# Altium PCB MyBus_microATXholes.PcbDoc
Units mm, origin at the board's own origin, x right, y up, seen from the top; angles counter-clockwise.
Board outline 241.3 x 222.25 mm, 2 copper layers (Top Layer, Bottom Layer); 10 components, 19 nets, 202 pads, 0 vias.
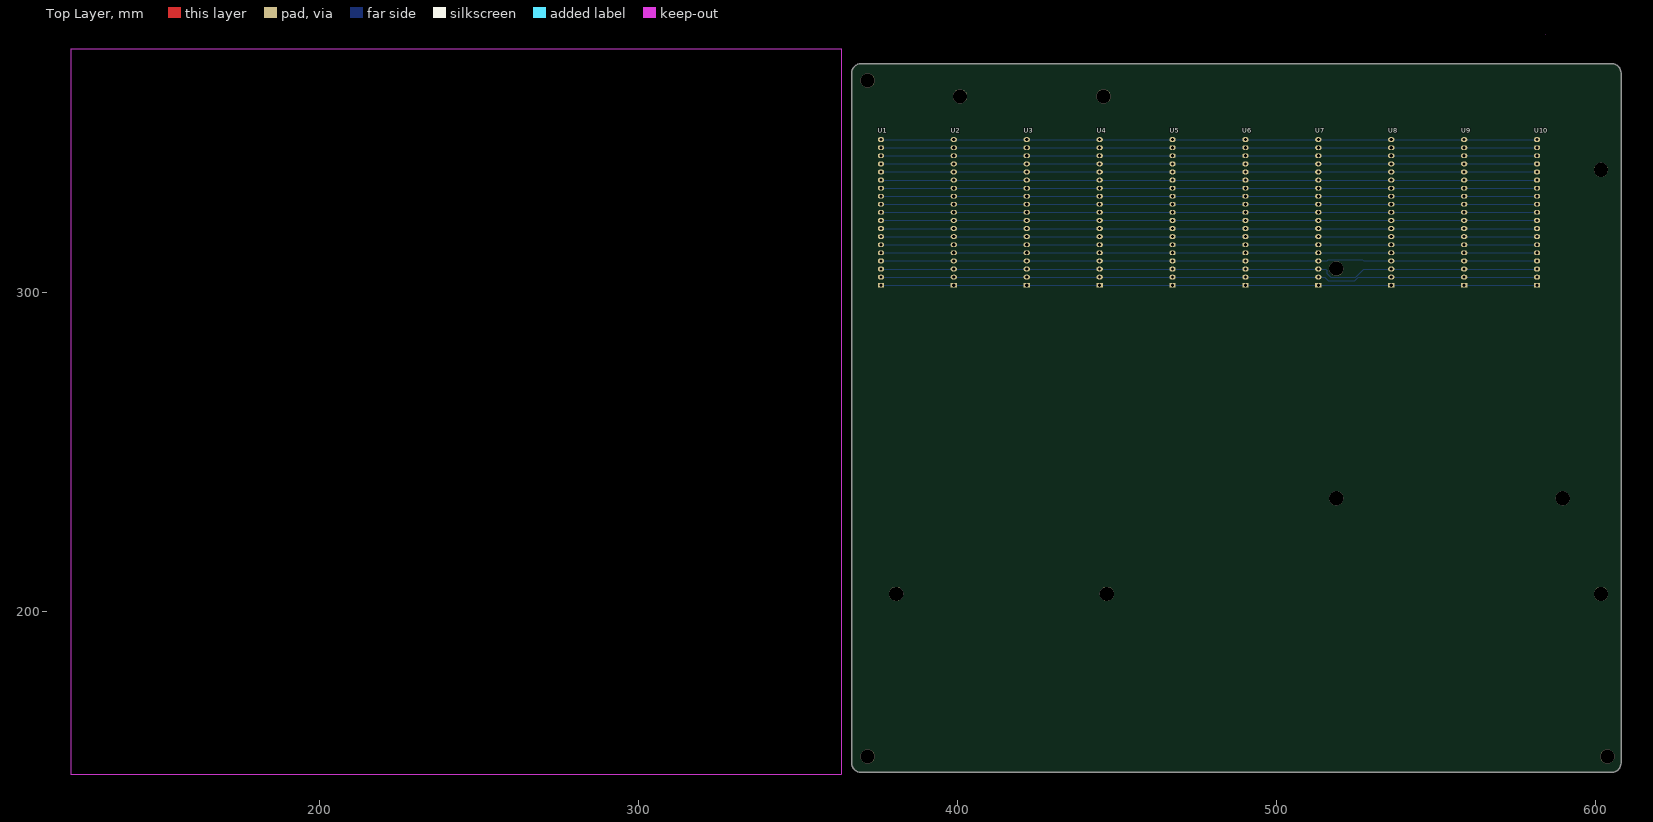
[diagram p0: Top Layer view]
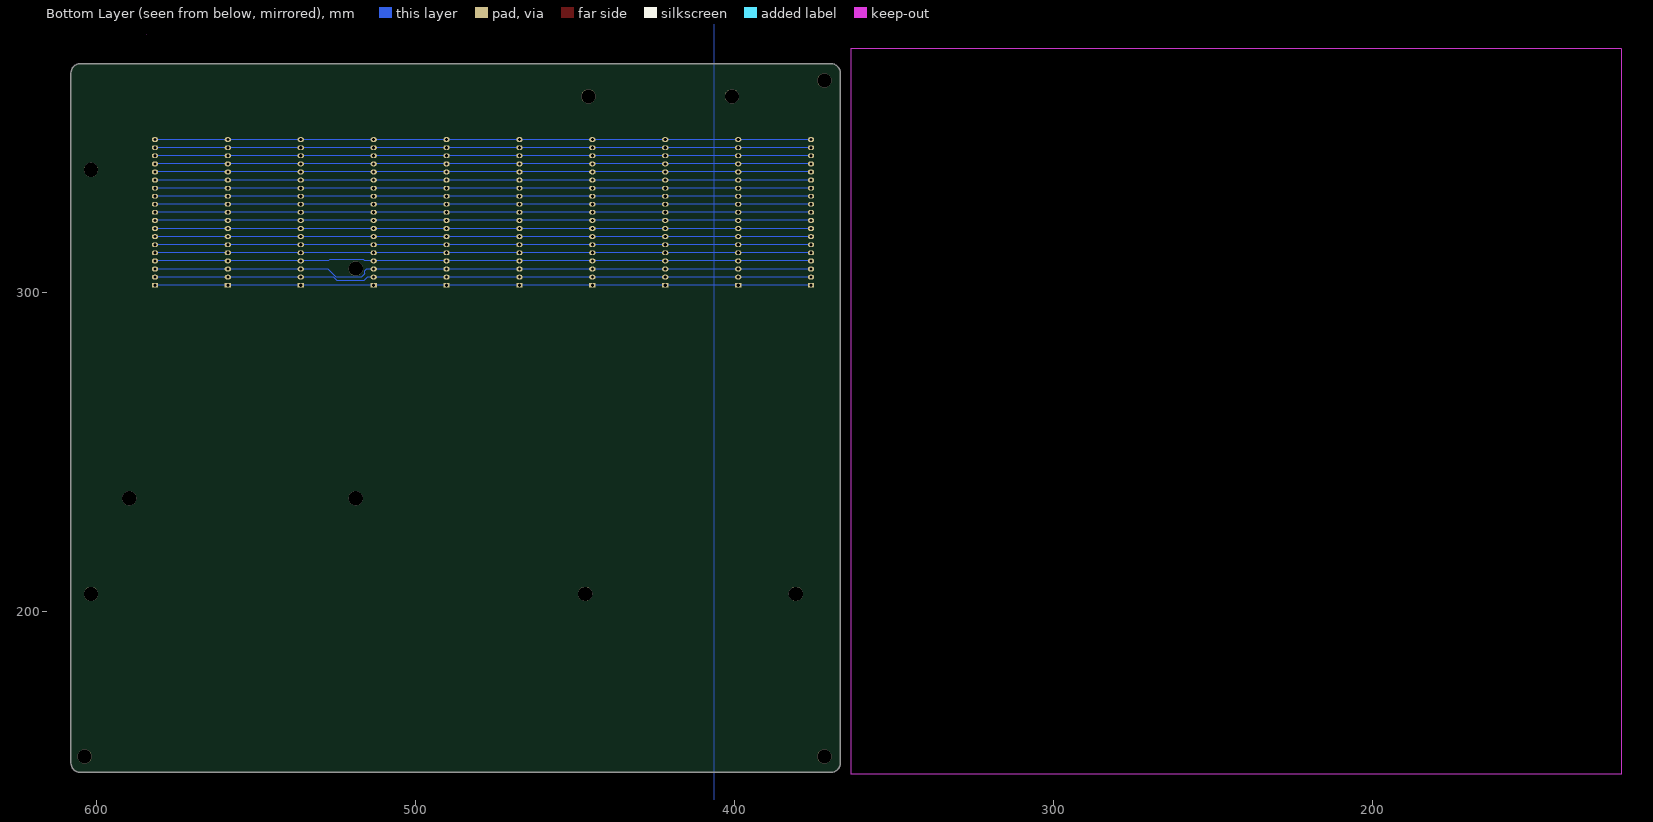
[diagram p1: Bottom Layer view, seen from below]
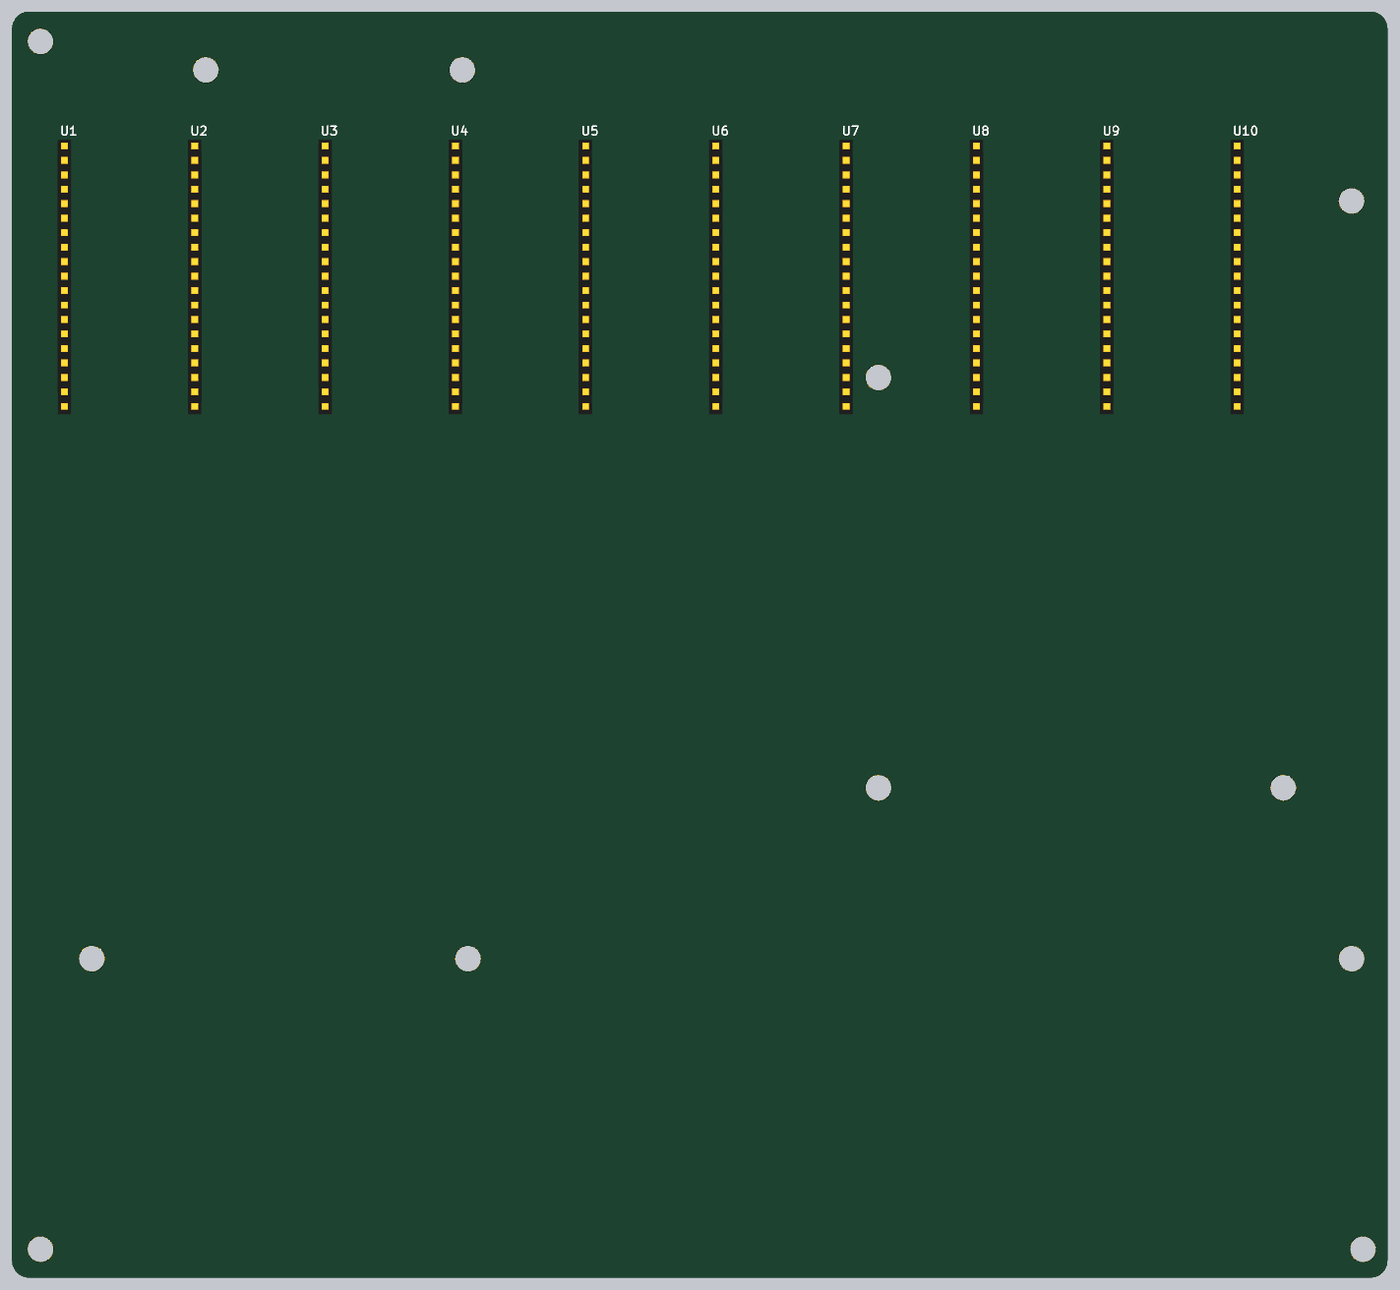
[diagram p2: 3D render of the assembled board from above, using the file's embedded part models]

## Layer stack, top to bottom
Top Solder: solder mask 0.0102, Solder Resist, Dk 3.5
Top Layer: signal copper 0.0356
Dielectric 1: dielectric 0.32, FR-4, Dk 4.8
Bottom Layer: signal copper 0.0356
Bottom Solder: solder mask 0.0102, Solder Resist, Dk 3.5

## Board outline
605.025,371.72 369.725,371.72 369.14,371.662 368.577,371.492 368.058,371.214 367.604,370.841 367.231,370.387 366.953,369.868 366.783,369.305 366.725,368.72 366.725,152.47 366.783,151.885 366.953,151.322 367.231,150.803 367.604,150.349 368.058,149.976 368.577,149.698 369.14,149.528 369.725,149.47 605.025,149.47 605.61,149.528 606.173,149.698 606.692,149.976 607.146,150.349 607.519,150.803 607.797,151.322 607.967,151.885 608.025,152.47 608.025,368.72 607.967,369.305 607.797,369.868 607.519,370.387 607.146,370.841 606.692,371.214 606.173,371.492 605.61,371.662
cut-out: 584.2,381

## Design rules (kind name [scope] priority, off if disabled: settings)
Clearance [All] p1: gap=0.254 ignorepadtopadclearanceinfootprint=FALSE except(0: Arc-Hole Track-Hole SMDPad-Hole THPad-Hole Via-Hole Fill-Hole Poly-Hole Region-Hole Text-Hole)
PolygonConnect [All] p1: connectstyle=Relief reliefconductorwidth=0.254 reliefentries=4 polygonreliefangle="90 Angle" airgapwidth=0.254
RoutingVias [All] p1: holewidth=0.711 width=1.27 viastyle="Through Hole" minholewidth=0.711 minwidth=1.27 maxholewidth=0.711 maxwidth=1.27
SolderMaskExpansion [All] p1: expansion=0.102
Width [All] p1: maxlimit=0.254 minlimit=0.254 preferedwidth=0.254
30 further rules are at their usual default settings.

## Components (designator, comment, footprint, x,y, rotation, side; value= is the part's Value field where it differs from the comment)
U1 "ETF 9 pin female socket" 1x19FEMALEHEADER 377.116,301.013 r90 top
U2 "ETF 9 pin female socket" 1x19FEMALEHEADER 399.976,301.013 r90 top
U3 "ETF 9 pin female socket" 1x19FEMALEHEADER 422.836,301.013 r90 top
U4 "ETF 9 pin female socket" 1x19FEMALEHEADER 445.696,301.013 r90 top
U5 "ETF 9 pin female socket" 1x19FEMALEHEADER 468.556,301.013 r90 top
U6 "ETF 9 pin female socket" 1x19FEMALEHEADER 491.416,301.013 r90 top
U7 "ETF 9 pin female socket" 1x19FEMALEHEADER 514.276,301.013 r90 top
U8 "ETF 9 pin female socket" 1x19FEMALEHEADER 537.136,301.013 r90 top
U9 "ETF 9 pin female socket" 1x19FEMALEHEADER 559.996,301.013 r90 top
U10 "ETF 9 pin female socket" 1x19FEMALEHEADER 582.856,301.013 r90 top

## Footprints (in the part's own frame and the unit in brackets; to place one, negate y for a bottom-side part, rotate by r counter-clockwise, add the part's x,y. Pads: shape width x height; smd on the part's side, far side on the other; paste and mask are expansions set on the pad)
1x19FEMALEHEADER [mm]
  rect 1.5x2 hole 1: 1(1.247,1.196)
  oval 1.5x2 hole 1: 2(3.787,1.196) 3(6.327,1.196) 4(8.867,1.196) 5(11.407,1.196) 6(13.947,1.196) 7(16.487,1.196) 8(19.027,1.196) 9(21.567,1.196) 10(24.107,1.196) 11(26.647,1.196) 12(29.137,1.196) 13(31.677,1.196) 14(34.217,1.196) 15(36.757,1.196) 16(39.297,1.196) 17(41.837,1.196) 18(44.377,1.196) 19(46.917,1.196)
  body extent 0,0 48.26,2.41, height 8.51

## Part data
U1 U2 U3 U4 U5 U6 U7 U8 U9 U10: library part 1x9socket

## Free pads (board coordinates)
  round 4.472 hole 4.472: 1(371.725,154.47) 1(371.725,366.47) 1(380.725,205.47) 1(400.725,361.47) 1(445.725,361.47) 1(446.725,205.47) 1(518.725,235.47) 1(518.725,307.47) 1(589.725,235.47) 1(601.725,205.47) 1(601.725,338.47) 1(603.725,154.47)

## Nets (pads, with @x,y where several pads share a name; then routed paths per layer and width w, separated by ;. In a path a pad name is that pad's centre, name@x,y a point inside that pad or via, vN(x,y) a via of type N, cw(c..) or ccw(c..) an arc to the next point about the centre after c; other vN are vias at no path point)
Bus1Pin1: U1.1 U2.1 U3.1 U4.1 U5.1 U6.1 U7.1 U8.1 U9.1 U10.1 | length 205.7
  Bottom Layer w0.254: U1.1 U2.1 U3.1 U4.1 U5.1 U6.1 U7.1 U8.1 U9.1 U10.1
Bus1Pin2: U1.2 U2.2 U3.2 U4.2 U5.2 U6.2 U7.2 U8.2 U9.2 U10.2 | length 206.6
  Bottom Layer w0.254: U1.2 U2.2 U3.2 U4.2 U5.2 U6.2 U7.2 515.112,304.8 516.179,303.733 524.485,303.733 525.551,304.8 U8.2 U9.2 U10.2
Bus1Pin3: U1.3 U2.3 U3.3 U4.3 U5.3 U6.3 U7.3 U8.3 U9.3 U10.3 | length 208.5
  Bottom Layer w0.254: U1.3 U2.3 U3.3 U4.3 U5.3 U6.3 U7.3 515.391,307.34 515.899,306.832 515.899,305.816 516.966,304.749 524.764,304.749 527.355,307.34 U8.3 U9.3 U10.3
Bus1Pin4: U1.4 U2.4 U3.4 U4.4 U5.4 U6.4 U7.4 U8.4 U9.4 U10.4 | length 206
  Bottom Layer w0.254: U1.4 U2.4 U3.4 U4.4 U5.4 U6.4 U7.4 515.798,309.88 516.128,310.21 526.923,310.21 527.253,309.88 U8.4 U9.4 U10.4
Bus1Pin5: U1.5 U2.5 U3.5 U4.5 U5.5 U6.5 U7.5 U8.5 U9.5 U10.5 | length 205.7
  Bottom Layer w0.254: U1.5 U2.5 U3.5 U4.5 U5.5 U6.5 U7.5 U8.5 U9.5 U10.5
Bus1Pin6: U1.6 U2.6 U3.6 U4.6 U5.6 U6.6 U7.6 U8.6 U9.6 U10.6 | length 205.7
  Bottom Layer w0.254: U1.6 U2.6 U3.6 U4.6 U5.6 U6.6 U7.6 U8.6 U9.6 U10.6
Bus1Pin7: U1.7 U2.7 U3.7 U4.7 U5.7 U6.7 U7.7 U8.7 U9.7 U10.7 | length 205.7
  Bottom Layer w0.254: U1.7 U2.7 U3.7 U4.7 U5.7 U6.7 U7.7 U8.7 U9.7 U10.7
Bus1Pin8: U1.8 U2.8 U3.8 U4.8 U5.8 U6.8 U7.8 U8.8 U9.8 U10.8 | length 205.7
  Bottom Layer w0.254: U1.8 U2.8 U3.8 U4.8 U5.8 U6.8 U7.8 U8.8 U9.8 U10.8
Bus1Pin9: U1.9 U2.9 U3.9 U4.9 U5.9 U6.9 U7.9 U8.9 U9.9 U10.9 | length 205.7
  Bottom Layer w0.254: U1.9 U2.9 U3.9 U4.9 U5.9 U6.9 U7.9 U8.9 U9.9 U10.9
Bus1Pin10: U1.10 U2.10 U3.10 U4.10 U5.10 U6.10 U7.10 U8.10 U9.10 U10.10 | length 205.7
  Bottom Layer w0.254: U1.10 U2.10 U3.10 U4.10 U5.10 U6.10 U7.10 U8.10 U9.10 U10.10
Bus1Pin11: U1.11 U2.11 U3.11 U4.11 U5.11 U6.11 U7.11 U8.11 U9.11 U10.11 | length 205.7
  Bottom Layer w0.254: U1.11 U2.11 U3.11 U4.11 U5.11 U6.11 U7.11 U8.11 U9.11 U10.11
Bus1Pin12: U1.12 U2.12 U3.12 U4.12 U5.12 U6.12 U7.12 U8.12 U9.12 U10.12 | length 205.7
  Bottom Layer w0.254: U1.12 U2.12 U3.12 U4.12 U5.12 U6.12 U7.12 U8.12 U9.12 U10.12
Bus1Pin13: U1.13 U2.13 U3.13 U4.13 U5.13 U6.13 U7.13 U8.13 U9.13 U10.13 | length 205.7
  Bottom Layer w0.254: U1.13 U2.13 U3.13 U4.13 U5.13 U6.13 U7.13 U8.13 U9.13 U10.13
Bus1Pin14: U1.14 U2.14 U3.14 U4.14 U5.14 U6.14 U7.14 U8.14 U9.14 U10.14 | length 205.7
  Bottom Layer w0.254: U1.14 U2.14 U3.14 U4.14 U5.14 U6.14 U7.14 U8.14 U9.14 U10.14
Bus1Pin15: U1.15 U2.15 U3.15 U4.15 U5.15 U6.15 U7.15 U8.15 U9.15 U10.15 | length 205.7
  Bottom Layer w0.254: U1.15 U2.15 U3.15 U4.15 U5.15 U6.15 U7.15 U8.15 U9.15 U10.15
Bus1Pin16: U1.16 U2.16 U3.16 U4.16 U5.16 U6.16 U7.16 U8.16 U9.16 U10.16 | length 205.7
  Bottom Layer w0.254: U1.16 U2.16 U3.16 U4.16 U5.16 U6.16 U7.16 U8.16 U9.16 U10.16
Bus1Pin17: U1.17 U2.17 U3.17 U4.17 U5.17 U6.17 U7.17 U8.17 U9.17 U10.17 | length 205.7
  Bottom Layer w0.254: U1.17 U2.17 U3.17 U4.17 U5.17 U6.17 U7.17 U8.17 U9.17 U10.17
Bus1Pin18: U1.18 U2.18 U3.18 U4.18 U5.18 U6.18 U7.18 U8.18 U9.18 U10.18 | length 205.7
  Bottom Layer w0.254: U1.18 U2.18 U3.18 U4.18 U5.18 U6.18 U7.18 U8.18 U9.18 U10.18
Bus1Pin19: U1.19 U2.19 U3.19 U4.19 U5.19 U6.19 U7.19 U8.19 U9.19 U10.19 | length 205.7
  Bottom Layer w0.254: U1.19 U2.19 U3.19 U4.19 U5.19 U6.19 U7.19 U8.19 U9.19 U10.19

## Polygon pours and split planes (outlines as drawn)
no net on Mechanical 1 (solid): 122.047,149.109 363.347,149.109 363.347,376.163 122.047,376.163
no net on Mechanical 1 (solid): 122.047,376.163 122.047,149.109 363.347,149.109 363.347,376.163
no net on Mechanical 1 (solid): 133.477,208.28
no net on Bottom Layer "A4" (solid, pour order 2): 406.4,101.6 616.4,101.6 616.4,398.6 406.4,398.6
no net on Bottom Layer (solid, pour order 0): 381,127

## Keep-outs
Keep-Out Layer:
  lines w0.254: 121.9,148.95 363.5,148.95 363.5,376.375 121.9,376.375 121.9,148.95